# Altium PCB ESP-RC-Car_OLDPCB.PcbDoc (part 2 of 2)
Units mm, origin at the board's own origin, x right, y up, seen from the top; angles counter-clockwise.
Board outline 100.25 x 60.25 mm, 4 copper layers (Top Layer, Int1 (Signal), Int2 (GND), Bottom Layer(PWR)), stack 1.586 mm thick; 110 components, 97 nets, 403 pads, 371 vias.
Unrouted connection lines stored in the file: 1.
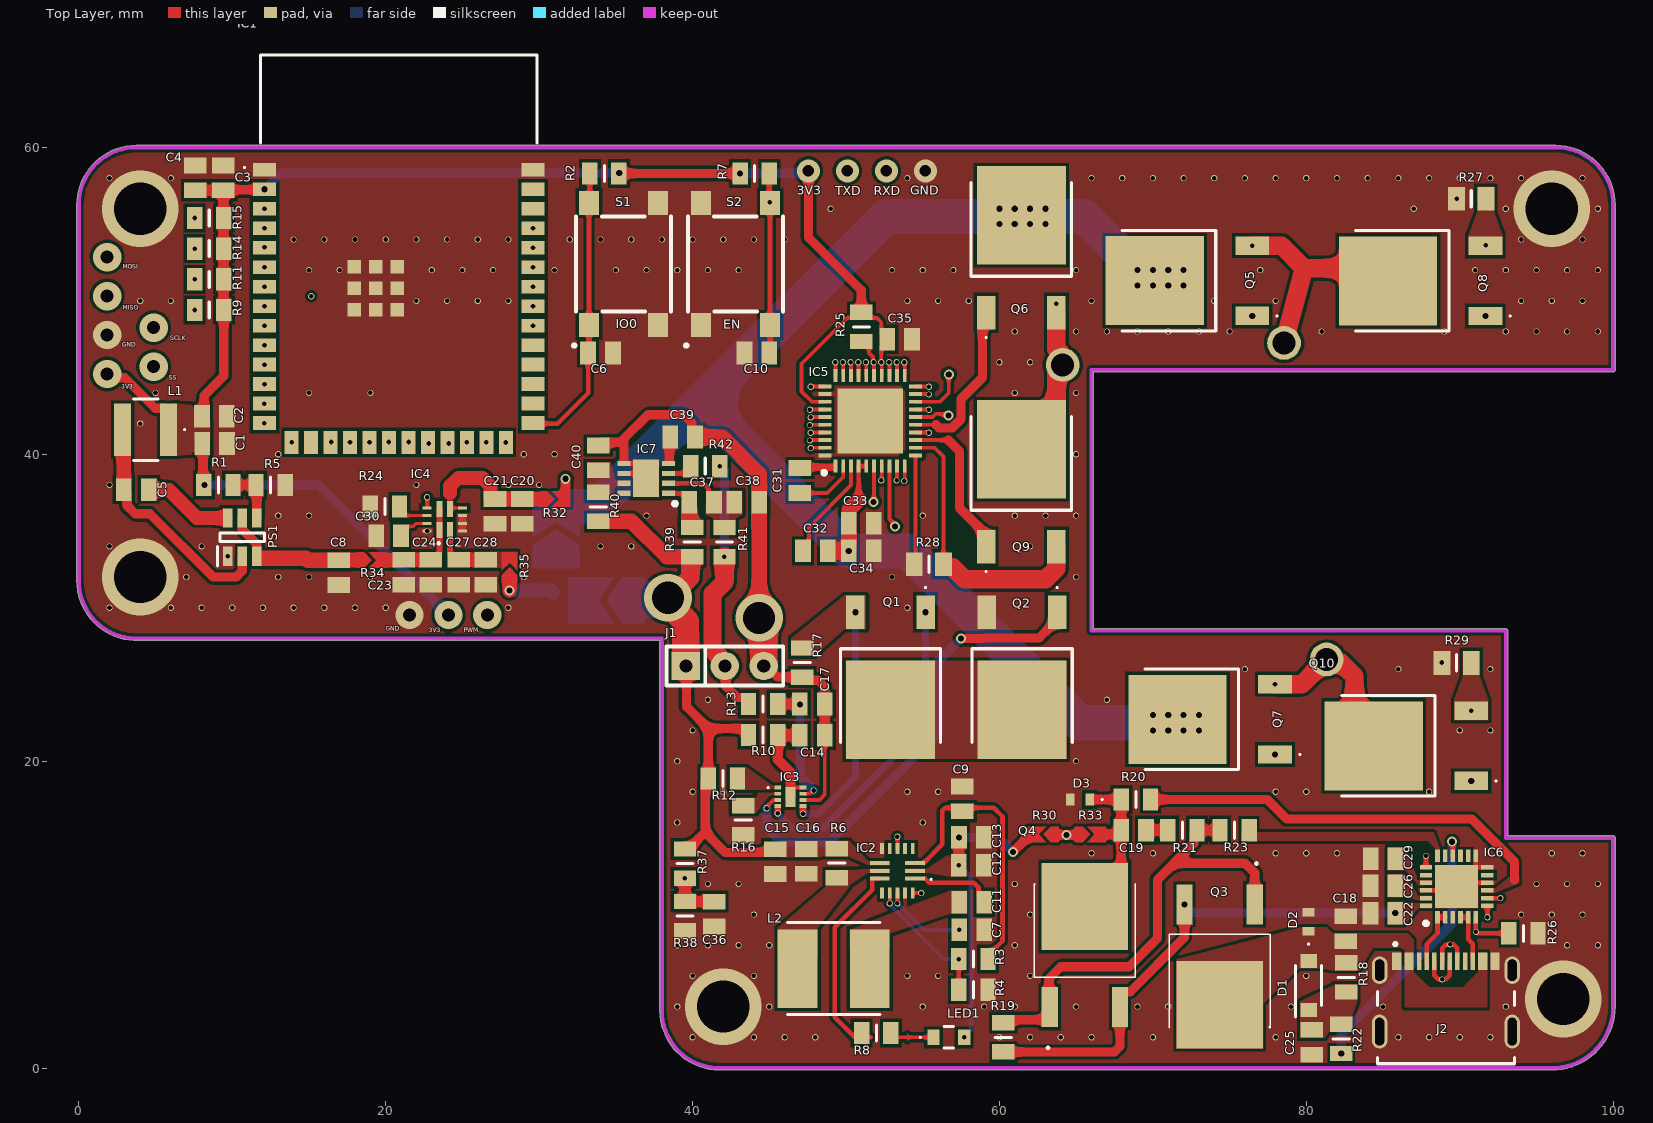
[diagram p0: Top Layer view]

## Polygon pours and split planes (outlines as drawn) (continued)
NetC40_2 on Top Layer "NETC40_2_L01_P033" (solid, pour order 33): 33.125,37.025 34.675,37.025 35,37.925 35.95,37.925 35.95,38.275 35,38.275 34.675,39.475 33.125,39.475
NetC37_1 on Top Layer "NETC37_1_L01_P032" (solid, pour order 32): 41.35,34.725 41.35,35.825 40.875,36.05 40.875,37.625 43.25,37.625 43.25,36.05 42.8,35.825 42.8,34.725
NetQ1_2 on Top Layer "NONET_L-01_P-001" (solid, pour order 21): 50,26.55 64.375,26.55 64.375,20.15 50,20.15
SPC on Top Layer "SPC_L01_P031" (solid, pour order 31): 90.2,27.175 90.2,25.519 89.65,24 89.65,22.675 91.85,22.675 91.85,24 91.3,25.519 91.3,27.175
NetC12_2 on Top Layer "NETC12_2_L01_P020" (solid, pour order 20): 53.85,12.975 55.25,12.975 56.712,13.95 57.875,13.95 57.875,12.475 56.75,12.475 55.25,12.725 53.85,12.725
VBAT+ on Top Layer "VBAT+_L01_P014" (solid, pour order 14): 52.85,13.225 51.45,13.225 50.125,13.8 48.575,13.8 48.225,13.75 44.65,13.75 44.65,14.8 48.575,14.8 50.225,14.8 51.45,13.475 52.85,13.475
SPA on Top Layer "SPA_L01_P030" (solid, pour order 30): 91.15,57.425 92.25,57.425 92.25,55.775 92.775,54.3 92.775,53 90.575,53 90.575,54.3 91.15,55.775
NetIC3_2 on Top Layer "NONET_L-01_P-001" (solid, pour order 26): 45.775,17.75 45,17.75 44.125,16.6 42.575,16.6 42.575,17.6 44.125,17.6 44.3,18 45.775,18
NetIC3_1 on Top Layer "NONET_L-01_P-001" (solid, pour order 25): 45.775,18.15 42.425,18.15 42.425,19.6 43.525,19.6 45.225,18.4 45.775,18.4
NetIC3_5 on Top Layer "NONET_L-01_P-001" (solid, pour order 23): 51.3,28.6 49.9,28.6 47.975,26.875 46.425,26.875 46.425,28 46.423,28.002 49.9,30.8 51.3,30.8
NetC11_2 on Top Layer "NETC11_2_L01_P019" (solid, pour order 19): 53.725,10.425 56.775,11.55 57.9,11.55 57.9,10.05 56.775,10.05 52.55,8.65 52.675,9.7
NetC11_2 on Top Layer "NETC11_2_L01_P018" (solid, pour order 18): 53.725,11.75 53.725,10.425 50.25,9.025 50.25,7.725 52.85,7.725 52.85,9.125 53.975,10.175 53.975,11.75
NetIC2_10 on Top Layer "NETIC2_10_L01_P017" (solid, pour order 17): 48.675,12.9 48.675,11.8 45.55,9.125 45.55,7.2 48.15,7.2 48.15,9.125 50.225,11.8 50.225,12.9
NetIC2_10 on Top Layer "NETIC2_10_L01_P016" (solid, pour order 16): 52.85,12.975 51.45,12.975 50.225,12.9 48.675,12.9 48.675,11.9 50.225,11.9 51.45,12.725 52.85,12.725
NetIC6_18 on Top Layer "NETIC6_18_L01_P010" (solid, pour order 10): 88.4,13.425 88.4,14.325 87.9,14.8 75.775,14.8 75.775,15.375 88.3,15.375 88.7,14.325 88.7,13.425
VBUS on Top Layer "VBUS_L01_P008" (solid, pour order 8): 87,6.275 87,8.375 86.6,8.775 86.35,8.775 81.725,8.775 81.325,9.175 79.65,9.175 71.525,7.075 75.45,8.15 71.525,7.075 71.525,1.25 77.2,1.25 77.2,7.075 77.203,7.072 77.203,7.078 77.2,7.069 77.2,4.175 79.525,6.5 80.825,6.5 81.775,6.35 83.425,6.35 84.35,7.825 83.975,7.825 84.725,7.825 85.075,7.825 86.186,7.825 86.4,7.625 86.4,6.275
NetC25_1 on Top Layer "NETC25_1_L01_P007" (solid, pour order 7): 79.6,1.975 79.6,4.25 79.6,4.35 81.875,5.45 83.325,5.45 83.325,4.35 83,3.45 83,2.35 81.45,2.35 81.2,1.975
NetC29_2 on Top Layer "NETC29_2_L01_P005" (solid, pour order 5): 88.2,11.925 87.322,11.925 86.425,12.9 85.3,12.9 85.3,14.375 86.425,14.375 87.3,12.225 88.2,12.225
NetC26_1 on Top Layer "NETC26_1_L01_P004" (solid, pour order 4): 88.2,10.925 87.3,10.925 86.425,11.125 85.3,11.125 85.3,12.625 86.4,12.625 87.3,11.225 88.2,11.225
NetC22_2 on Top Layer "NETC22_2_L01_P003" (solid, pour order 3): 88.2,10.725 87.3,10.725 86.425,10.85 85.3,10.85 85.3,9.35 86.425,9.35 87.3,10.425 88.2,10.425
VBUS on Top Layer "VBUS_L01_P000" (solid, pour order 0): 91.2,7.525 91.2,6.275 90.2,5.275 88,5.275 87,6.275 87,7.525 86.4,7.525 86.4,6.275 86.4,3.95 91.8,3.95 91.8,6.275 91.8,7.525
VDRAIN on Bottom Layer(PWR) "VDRAIN_L04_P042" (solid, pour order 42): 69,24 74,24 74,21 69,21
VDRAIN on Bottom Layer(PWR) "VDRAIN_L04_P041" (solid, pour order 41): 59,57 64,57 64,54 59,54
VDRAIN on Bottom Layer(PWR) "VDRAIN_L04_P040" (solid, pour order 40): 68,50 68,53 73,53 73,50
VBATJ on Bottom Layer(PWR) "VBATJ_L04_P034" (solid, pour order 34): 33.675,29.05 33.675,32.05 32.6,32.05 32.6,33.425 29.625,33.425 29.6,33.45 29.6,29.026
GND on Int2 (GND) "GND_L03_P039" (solid, remove dead copper, pour order 39): 0,60 101,60 101,0 38,0 38,28 0,28

## Keep-outs
Keep-Out Layer:
  lines w0.254: 3.623,28 38,28 38,3.75 ccw(c41.75,3.75) 41.75,0 96,0 ccw(c96,4) 100,4 100,5 ; 3.623,28.002 cw(c3.75,31.75) 0,31.75 0,56.25 cw(c3.75,56.25) 3.75,60 96.25,60 cw(c96.25,56.25) 100,56.25 100,54.25 100,45.5 93,45.5 66,45.5 66,28.5 93,28.5 93,15 100,15 100,5.67 100,5 ; 100,5 100,5

## Silkscreen, mask and mechanical layers (free items; w line width, h text height)
Top Overlay:
  text "3V3" at 46.8,56.711 h1
  text "GND" at 54.2,56.711 h1
  text "TXD" at 49.3,56.7 h1
  text "RXD" at 51.8,56.7 h1
  text "MOSI" at 2.875,52.006 h0.5
  text "MISO" at 2.875,49.331 h0.5
  text "IO0" at 35,48.011 h1
  text "EN" at 42,48 h1
  text "SCLK" at 5.95,47.331 h0.5
  text "GND" at 2.825,46.906 h0.5
  text "SS" at 5.875,44.756 h0.5
  text "3V3" at 2.75,44.181 h0.5
  text "GND" at 20,28.406 h0.5
  text "3V3" at 22.8,28.306 h0.5
  text "PWM" at 25.1,28.3 h0.5